# Altium PCB SNA.PcbDoc (part 6 of 6)
Units mm, origin at the board's own origin, x right, y up, seen from the top; angles counter-clockwise.
Board outline 122 x 98 mm, 4 copper layers (L1 Top Layer, L2 Inner 1, L3 Inner 2, L4 Bottom Layer), stack 1.588 mm thick; 466 components, 299 nets, 1366 pads, 4218 vias.
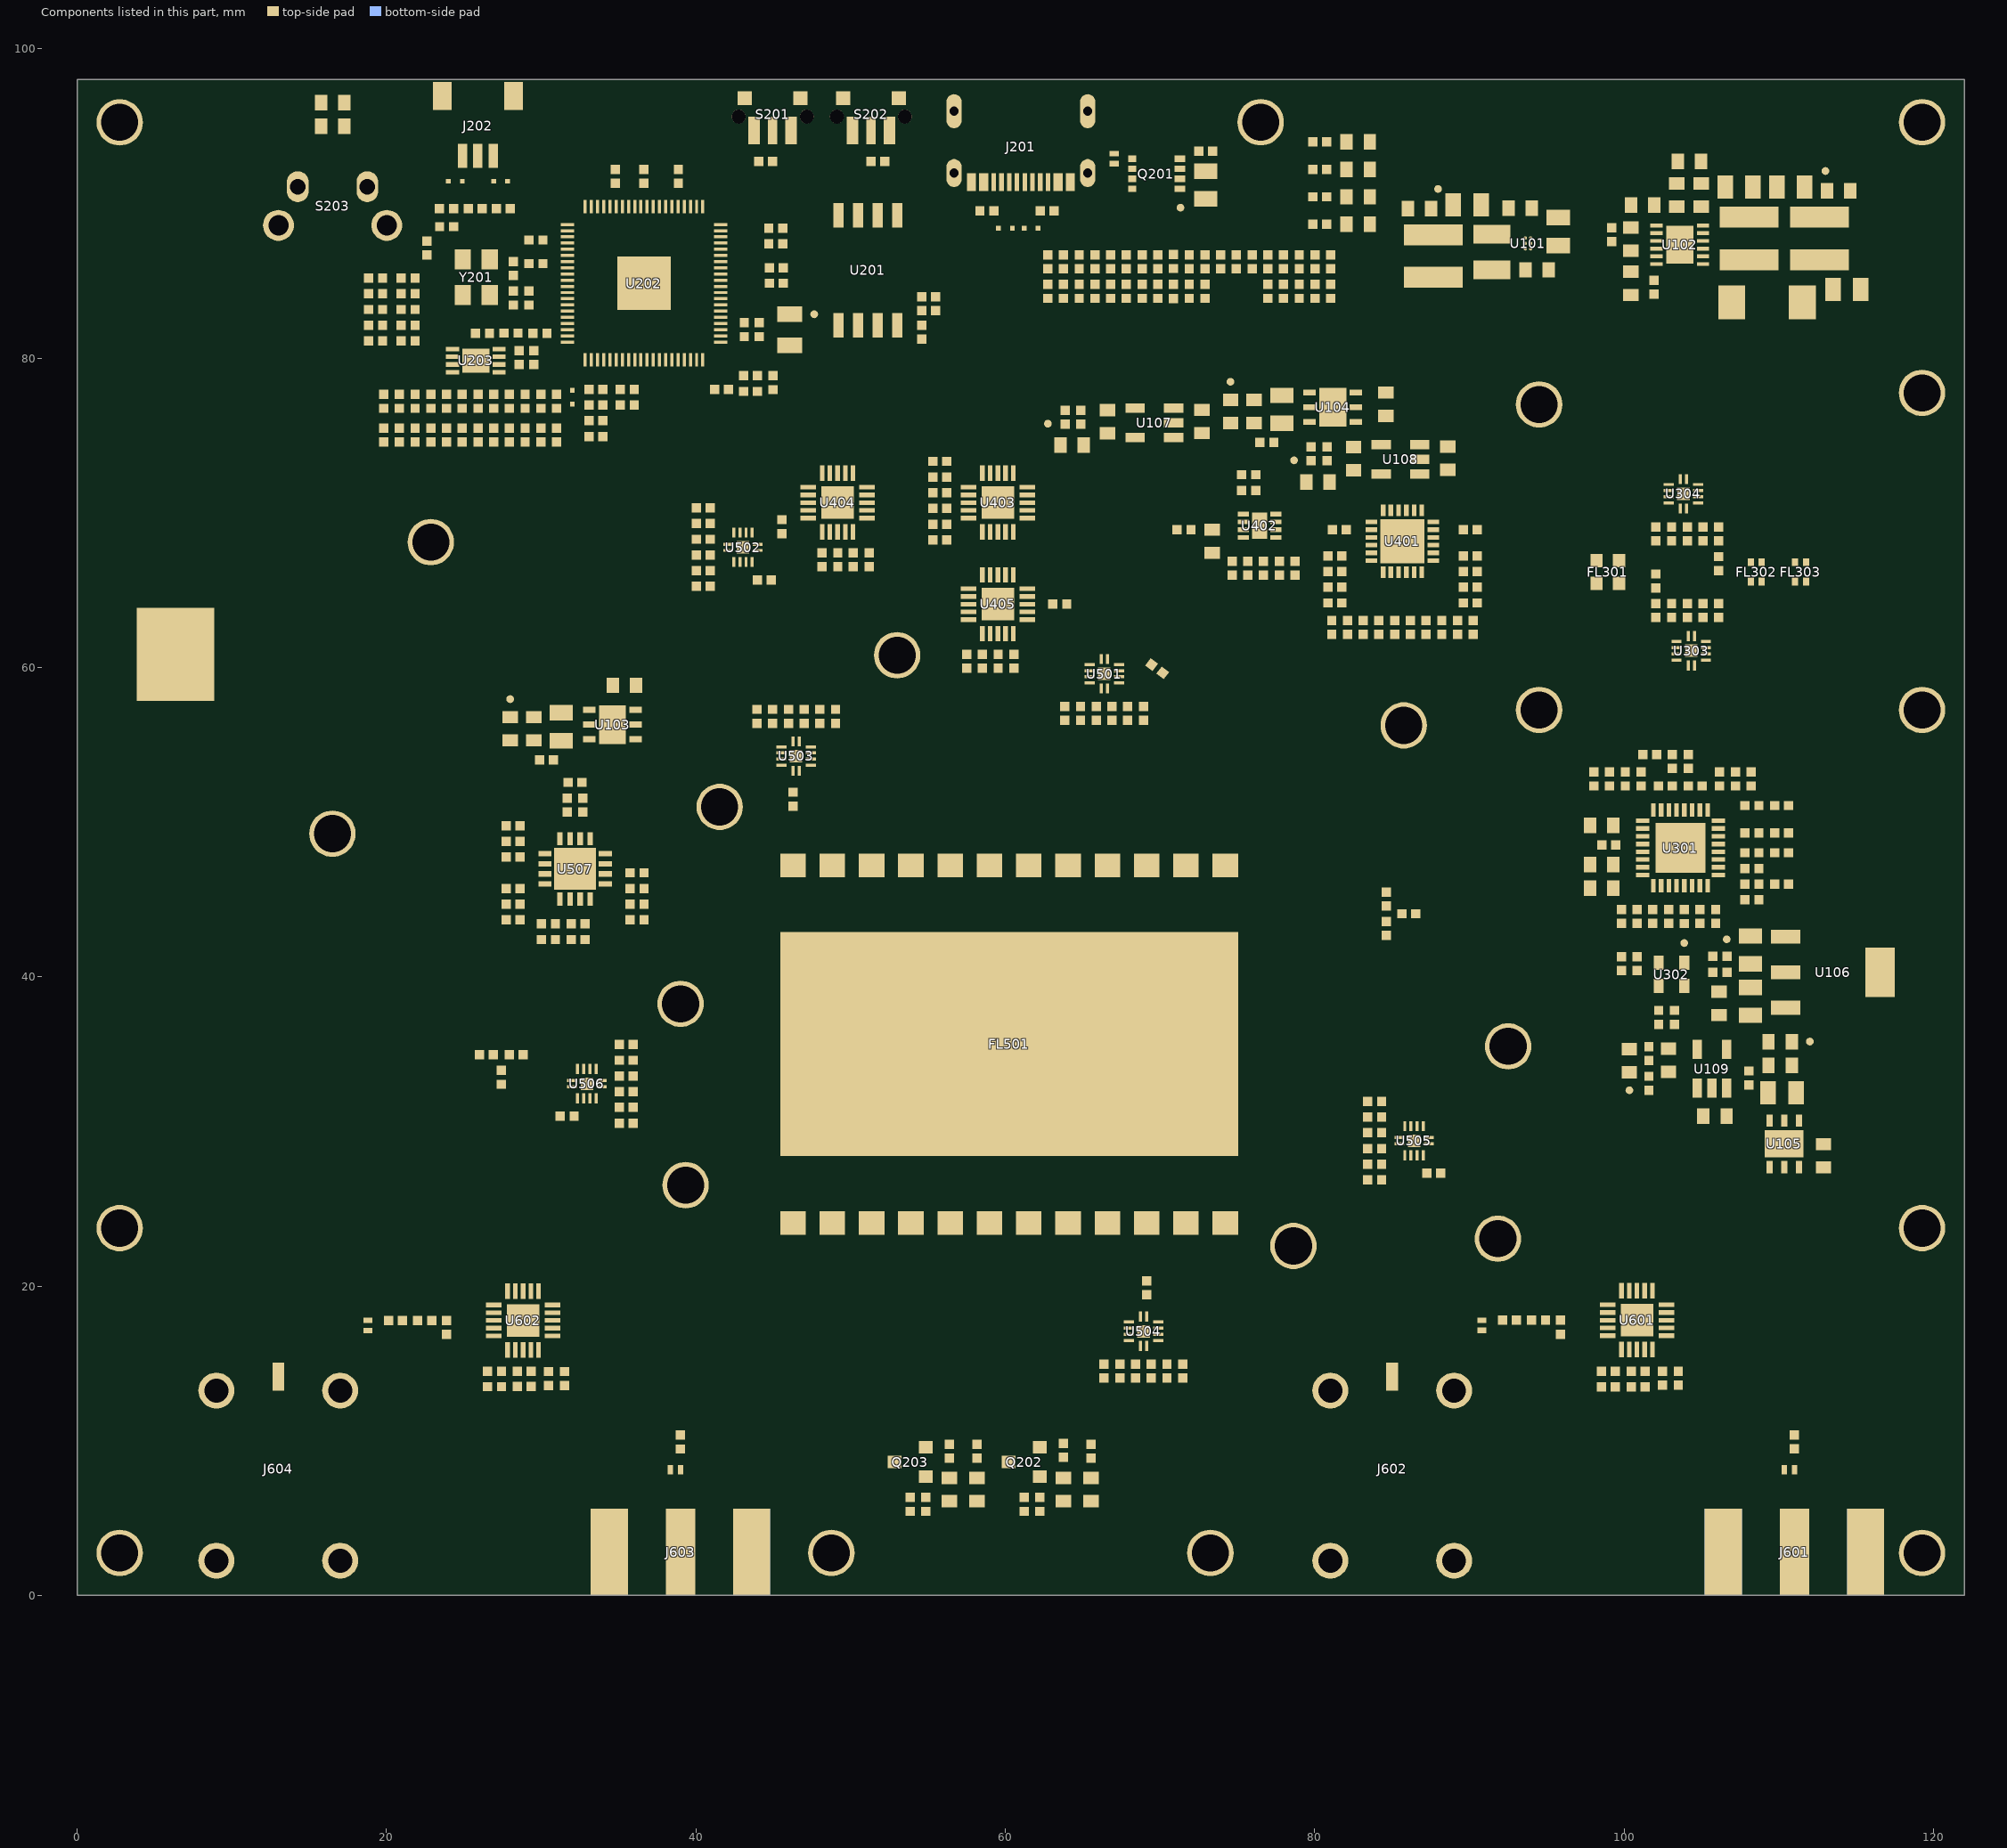
[diagram p8: the components of this part, seen from the top]

## Silkscreen, mask and mechanical layers (free items; w line width, h text height) (continued)
Bottom Solder 1:
  circle w3: c16.5,49.25 r0.559
  circle w3: c22.86,68.102 r0.564
  circle w3: c41.532,50.984 r0.477
  circle w3: c91.835,23.063 r0.69
  circle w3: c78.615,22.598 r0.373
  circle w3: c39.325,26.494 r0.366
  region: 85.172,56.388 94.742,56.388 94.742,31.59 cw(c93.796,31.59) 94.465,30.921 90.49,34.896 cw(c92.286,36.692) 89.746,36.692 89.746,50.815
  region: 0,0 0,98 122,98 122,0 0,0 3,3 119,3 119,95 3,95 3,3
  lines w3: 1.5,88.5 cw(c9.375,88.625) 9.25,96.5 ; 1.529,9.677 ccw(c9.706,9.677) 10.205,1.515 ; 1.529,14.039 cw(c11.282,14.039) 11.282,23.793 ; 1.529,33.546 ccw(c11.282,33.546) 11.282,23.793 ; 2.5,21 2.5,21.793 4.5,23.793 4.5,25 4,25.5 ; 17.169,44.1 ccw(c33.884,44.27) 22.237,32.28 cw(c15.214,24.31) 25.824,23.793 11.282,23.793 ; 17.178,43.721 17.178,56.853 cw(c30.125,56.378) 30.6,69.326 ; 30.345,69.333 35.431,69.333 ; 30.691,61.997 ccw(c30.335,56.3) 24.638,56.655 24.638,50.748 24.638,44.54 ccw(c31.139,44.75) 31.349,38.249 36.995,38.249 ; 30.696,61.993 36.02,61.993 cw(c35.781,58.24) 39.534,58.001 39.534,53.552 ; 38.55,1.5 ccw(c39.049,9.662) 47.226,9.662 ccw(c55.403,9.662) 55.902,1.5 ; 39.514,26.568 39.514,30.554 39.515,45.027 ; 39.514,35.692 ccw(c36.957,35.692) 36.918,38.249 ccw(c36.957,40.806) 39.514,40.806 ; 39.534,53.661 ccw(c42.158,53.612) 42.109,50.988 ; 46.383,14.617 cw(c33.279,9.848) 47.224,9.848 47.224,2.059 ; 50.522,77.688 58.968,77.688 ; 50.56,51.039 76.348,51.039 cw(c76.356,48.115) 79.28,48.115 79.28,30.579 79.28,28.701 ; 53.208,59.108 53.208,61.346 ; 58.969,77.688 ccw(c58.855,81.34) 61.96,79.416 cw(c65.066,77.493) 64.952,81.144 81.79,81.144 ; 61.753,79.117 61.755,79.118 ; 66.098,1.5 ccw(c66.597,9.662) 74.774,9.662 ccw(c82.951,9.662) 83.45,1.5 ; 66.243,67.409 63.591,67.409 cw(c62.54,60.29) 67.941,65.044 ; 66.397,67.398 ccw(c82.648,76.379) 77.527,58.532 cw(c75.132,44.094) 89.746,44.876 89.752,38.068 ccw(c98.254,37.805) 97.991,29.303 cw(c97.807,20.191) 104.339,26.546 ; 74.776,2.059 74.788,12.001 cw(c86.557,12.001) 74.967,14.044 ; 78.479,21.217 ccw(c68.242,25.963) 79.344,27.975 ; 79.28,28.689 ccw(c84.198,28.689) 79.355,27.835 ; 80.089,57.884 ccw(c83.758,68.651) 84.09,57.281 ; 81.544,81.144 84.09,81.144 cw(c84.184,77.63) 87.699,77.724 106.844,77.724 120.483,77.724 ; 82.028,57.288 101.388,57.288 ; 86.557,23.77 97.536,23.792 ; 89.078,57.288 ccw(c89.876,61.867) 94.454,61.069 ccw(c98.497,61.326) 98.753,57.283 ; 90.288,77.724 cw(c90.345,73.615) 94.454,73.673 ; 94.454,68.124 94.454,52.787 ; 94.454,77.724 94.454,73.65 cw(c98.517,73.661) 98.505,77.724 ; 99.004,57.288 ccw(c98.98,52.763) 94.454,52.787 ; 99.131,29.208 cw(c104.434,37.665) 94.454,37.45 94.454,52.787 ; 104.369,26.549 ccw(c110.901,32.904) 110.718,23.793 ; 106.844,57.184 120.483,57.184 ; 110.764,77.707 ccw(c110.755,87.46) 120.508,87.46 ; 110.764,77.718 cw(c110.764,67.965) 120.517,67.965 ; 111.795,1.515 ccw(c112.294,9.677) 120.471,9.677 ; 112.75,96.5 cw(c112.625,88.625) 120.5,88.5 ; 117.689,57.036 118.956,58.302 118.956,58.986 ; 118.5,22 118.5,22.811 117.689,23.621 118.5,24.432 118.5,25.243 119.257,26 119.5,26 ; 118.5,55.415 118.5,56.225 ; 118.5,75.954 118.5,76.765 ; 118.956,78.842 118.956,79.526 ; 120.471,14.039 ccw(c110.718,14.039) 110.718,23.793 ; 120.471,33.546 cw(c110.718,33.546) 110.718,23.793 ; 120.508,66.932 cw(c110.755,66.932) 110.764,57.179 cw(c110.764,47.426) 120.517,47.426 ; 45.771,61.354 ccw(c46.19,72.788) 54.695,65.135 54.695,58.04 51.866,58.026 ccw(c48.667,58.153) 48.611,61.354 45.771,61.354
  text ".Layer_Name" at 37.689,-54.58 h1.8
M01_Board-Outline:
  the board outline again, w0.2
M02_Hot_Plate_Region:
  lines w0.254: 17.094,7.79 117.094,7.79 117.094,97.79 17.094,97.79 17.094,7.79
  text ".Layer_Name" at 37.689,-54.58 h1.8
M04_Miscellaneous:
  text ".Layer_Name" at 37.689,-54.58 h1.8
M05_Drill-Infos:
  text ".Layer_Name" at 37.689,-54.58 h1.8
M06_Board-Dimensions:
  text ".Layer_Name" at 37.672,-54.629 h1.8
M07_Case-Top:
  text ".Layer_Name" at 37.689,-54.58 h1.8
M08_Case-Bot:
  text ".Layer_Name" at 37.689,-54.58 h1.8
M09_DXF-Top:
  text ".Layer_Name" at 37.689,-54.58 h1.8
M10_DXF-Bot:
  text ".Layer_Name" at 37.689,-54.58 h1.8
M13_Comp-Outline-Top:
  text ".Layer_Name" at 37.689,-54.58 h1.8
M14_Comp-Outline-Bot:
  text ".Layer_Name" at 37.689,-54.58 h1.8
M15_Place-Outline-Top:
  text ".Layer_Name" at 37.689,-54.58 h1.8
Drill Drawing:
  circle w0.12: c39.425,123.263 r0.667
  lines w0.12: 38.758,125.596 39.092,125.596 39.425,125.929 39.758,125.596 40.092,125.596 40.092,125.929 39.758,126.263 40.092,126.596 40.092,126.929 39.758,126.929 39.425,126.596 39.092,126.929 38.758,126.929 38.758,126.596 39.092,126.263 38.758,125.929 38.758,125.596 ; 38.758,128.929 38.758,129.596 39.092,129.596 39.092,129.929 39.758,129.929 39.758,129.596 40.092,129.596 40.092,128.929 39.758,128.929 39.758,128.596 39.092,128.596 39.092,128.929 38.758,128.929 ; 38.758,131.596 38.758,132.929 40.092,132.929 40.092,131.596 38.758,131.596 ; 38.758,135.929 39.425,134.596 40.092,135.929 38.758,135.929
  lines w0.2: 37.587,121.696 85.863,121.696 ; 37.587,136.696 85.863,136.696 ; 47.383,118.696 47.383,139.696 ; 56.713,118.696 56.713,139.696 ; 67.713,118.696 67.713,139.696 ; 75.396,118.696 75.396,139.696 ; 37.587,118.696 37.587,139.696 85.863,139.696 85.863,118.696 37.587,118.696
  text "Symbol" at 39.387,137.596 h1.44
  text "Count" at 48.283,137.596 h1.44
  text "Hole Size" at 57.613,137.596 h1.44
  text "Plated" at 68.613,137.596 h1.44
  text "Via/Pad" at 76.296,137.596 h1.44
  text "140" at 48.283,134.596 h1.2
  text "0.30mm" at 57.613,134.596 h1.2
  text "PTH" at 68.613,134.596 h1.2
  text "Via" at 76.296,134.596 h1.2
  text "10" at 48.283,131.596 h1.2
  text "0.90mm" at 57.613,131.596 h1.2
  text "PTH" at 68.613,131.596 h1.2
  text "Pad" at 76.296,131.596 h1.2
  text "4" at 48.283,128.596 h1.2
  text "1.30mm" at 57.613,128.596 h1.2
  text "PTH" at 68.613,128.596 h1.2
  text "Pad" at 76.296,128.596 h1.2
  text "5" at 48.283,125.596 h1.2
  text "2.70mm" at 57.613,125.596 h1.2
  text "PTH" at 68.613,125.596 h1.2
  text "Pad" at 76.296,125.596 h1.2
  text "2" at 48.283,122.596 h1.2
  text "3.30mm" at 57.613,122.596 h1.2
  text "PTH" at 68.613,122.596 h1.2
  text "Pad" at 76.296,122.596 h1.2
  text "161 Total" at 48.283,119.596 h1.2
  text ".Layer_Name" at 37.689,-54.512 h1.8
  text "View from Top" at 48.015,-57.551 h1.2
M18_Title-Top:
  lines w0.15: 15.399,-60.575 15.399,-49.575 ; 15.399,-58.575 56.899,-58.575 ; 15.399,-55.575 97.899,-55.575 ; 37.624,-55.575 37.624,-49.575 ; 37.624,-55.301 37.624,-52.301 ; 56.699,-58.575 97.899,-58.575 ; 61.197,-58.575 61.197,-55.575 ; 72.899,-58.575 72.899,-55.575 ; 76.899,-55.575 76.899,-52.575 ; 76.899,-49.575 76.899,-52.575 ; 84.899,-58.575 84.899,-55.575 ; 96.6,-58.576 96.6,-55.576 96.6,-52.576 96.6,-49.575 ; 97.898,-60.576 126.124,-60.576 126.124,-49.575 97.898,-49.575 ; 97.898,-58.575 126.124,-58.575 ; 97.898,-55.576 126.124,-55.576 ; 97.898,-52.575 126.124,-52.575 ; 97.899,-60.575 -11.601,-60.575 -11.601,-49.575 97.899,-49.575 ; 105.125,-52.575 76.899,-52.575
  text "VERTRAULICH CONFIDENTIAL Copyright by Spacetek Technology AG. Fuer dieses Dokument behalten wir uns alle Rechte vor. We reserve all rights in respect of this document." at 4.725,-49.1 h1
  text "Project:" at 24.1,-51.3 h1
  text "Artwork:" at 54.7,-51.3 h1
  text "Variant:" at 98.024,-51.55 h1
  text "Number:" at 77.899,-51.575 h1
  text ".VariantName" at 105.574,-51.6 h1
  text ".Organization" at -10.9,-51.7 h1.4
  text ".STTNumber" at 85.499,-52.012 h1
  text ".Address1" at -10.9,-54 h1
  text ".VersionControl_RevNumberShort" at 105.324,-54.475 h1
  text ".Project" at 18.9,-54.6 h1.5
  text "Date:" at 78.831,-54.606 h1
  text ".PCBRelease" at 85.499,-54.606 h1
  text "GIT:" at 99.074,-54.6 h1
  text ".Address2" at -10.9,-55.9 h1
  text "Design:" at 74.099,-57.475 h1
  text "Model:" at 15.899,-57.575 h1
  text ".Board" at 20.899,-57.575 h1.2
  text "Version:" at 62.599,-57.675 h1
  text ".PCBVersion" at 68.699,-57.675 h1.1
  text ".PCBDrawnBy" at 79.725,-57.675 h1.1
  text "Check:" at 85.899,-57.675 h1
  text "Print Date:" at 97.024,-57.675 h1
  text ".print_Date" at 105.449,-57.675 h1
  text ".Address3" at -10.9,-57.7 h1
  text ".PCBCheckedBy" at 90.925,-57.775 h1.1
  text ".print_Time" at 114.575,-57.775 h1
  text ".Address4" at -10.901,-59.375 h1
  text ".GitLink" at 16.075,-59.975 h0.9
  text ".Pcb_File_Name_No_Path" at 90.4,-60.3 h0.9
M19_Title-Bot:
  lines w0.15: -11.601,-58.575 16.625,-58.575 ; -11.601,-55.575 16.625,-55.575 ; -11.601,-52.575 16.625,-52.575 ; 9.398,-52.575 37.624,-52.575 37.624,-55.575 ; 16.624,-60.575 126.124,-60.575 ; 16.624,-58.575 57.824,-58.575 ; 16.624,-55.575 99.124,-55.575 ; 16.624,-49.575 126.124,-49.575 126.124,-60.575 ; 16.625,-60.575 -11.601,-60.575 -11.601,-49.575 16.625,-49.575 ; 17.922,-58.575 17.922,-55.575 17.922,-52.575 ; 17.922,-52.575 17.922,-49.575 ; 29.624,-58.575 29.624,-55.574 ; 37.624,-52.575 37.624,-49.575 ; 41.624,-58.575 41.624,-55.575 ; 53.325,-58.575 53.325,-55.574 ; 57.624,-58.575 99.124,-58.575 ; 76.899,-55.575 76.899,-49.575 ; 76.899,-55.3 76.899,-52.3 ; 99.124,-60.575 99.124,-49.575
  text "VERTRAULICH CONFIDENTIAL Copyright by Spacetek Technology AG. Fuer dieses Dokument behalten wir uns alle Rechte vor. We reserve all rights in respect of this document." at 109.8,-49.1 h1
  text "Artwork:" at 59.822,-51.3 h1
  text "Project:" at 90.422,-51.3 h1
  text "Variant:" at 16.499,-51.55 h1
  text "Number:" at 36.624,-51.575 h1
  text ".VariantName" at 8.949,-51.6 h1
  text ".Organization" at 125.422,-51.7 h1.4
  text ".STTNumber" at 29.475,-51.937 h1
  text ".Address1" at 125.422,-54 h1
  text ".VersionControl_RevNumberShort" at 9.199,-54.475 h1
  text "Date:" at 36.624,-54.582 h1
  text "GIT:" at 15.449,-54.6 h1
  text ".PCBRelease" at 29.324,-54.6 h1
  text ".Project" at 95.622,-54.6 h1.5
  text ".Address2" at 125.422,-55.9 h1
  text "Design:" at 40.424,-57.475 h1
  text ".Board" at 93.624,-57.575 h1.2
  text "Model:" at 98.624,-57.575 h1
  text ".print_Time" at -0.751,-57.625 h1
  text ".PCBDrawnBy" at 34.95,-57.625 h1.1
  text ".print_Date" at 9.074,-57.675 h1
  text "Print Date:" at 17.499,-57.675 h1
  text ".PCBCheckedBy" at 23.325,-57.675 h1.1
  text "Check:" at 28.624,-57.675 h1
  text ".PCBVersion" at 45.824,-57.675 h1.1
  text "Version:" at 51.924,-57.675 h1
  text ".Address3" at 125.422,-57.7 h1
  text ".Address4" at 125.424,-59.375 h1
  text ".GitLink" at 98.447,-59.975 h0.9
  text ".Pcb_File_Name_No_Path" at 24.122,-60.3 h0.9

## Dimensions
0,0 to 122,0 on M06_Board-Dimensions
0,0 to 0,98 on M06_Board-Dimensions

## Text inside footprints (layer, text, board x,y; h text height)
FB3: L1 Top Layer "S/N:" at 5.675,68.888 h1.6 r270